# EAGLE board switch panel (EAGLE 7.2.0)
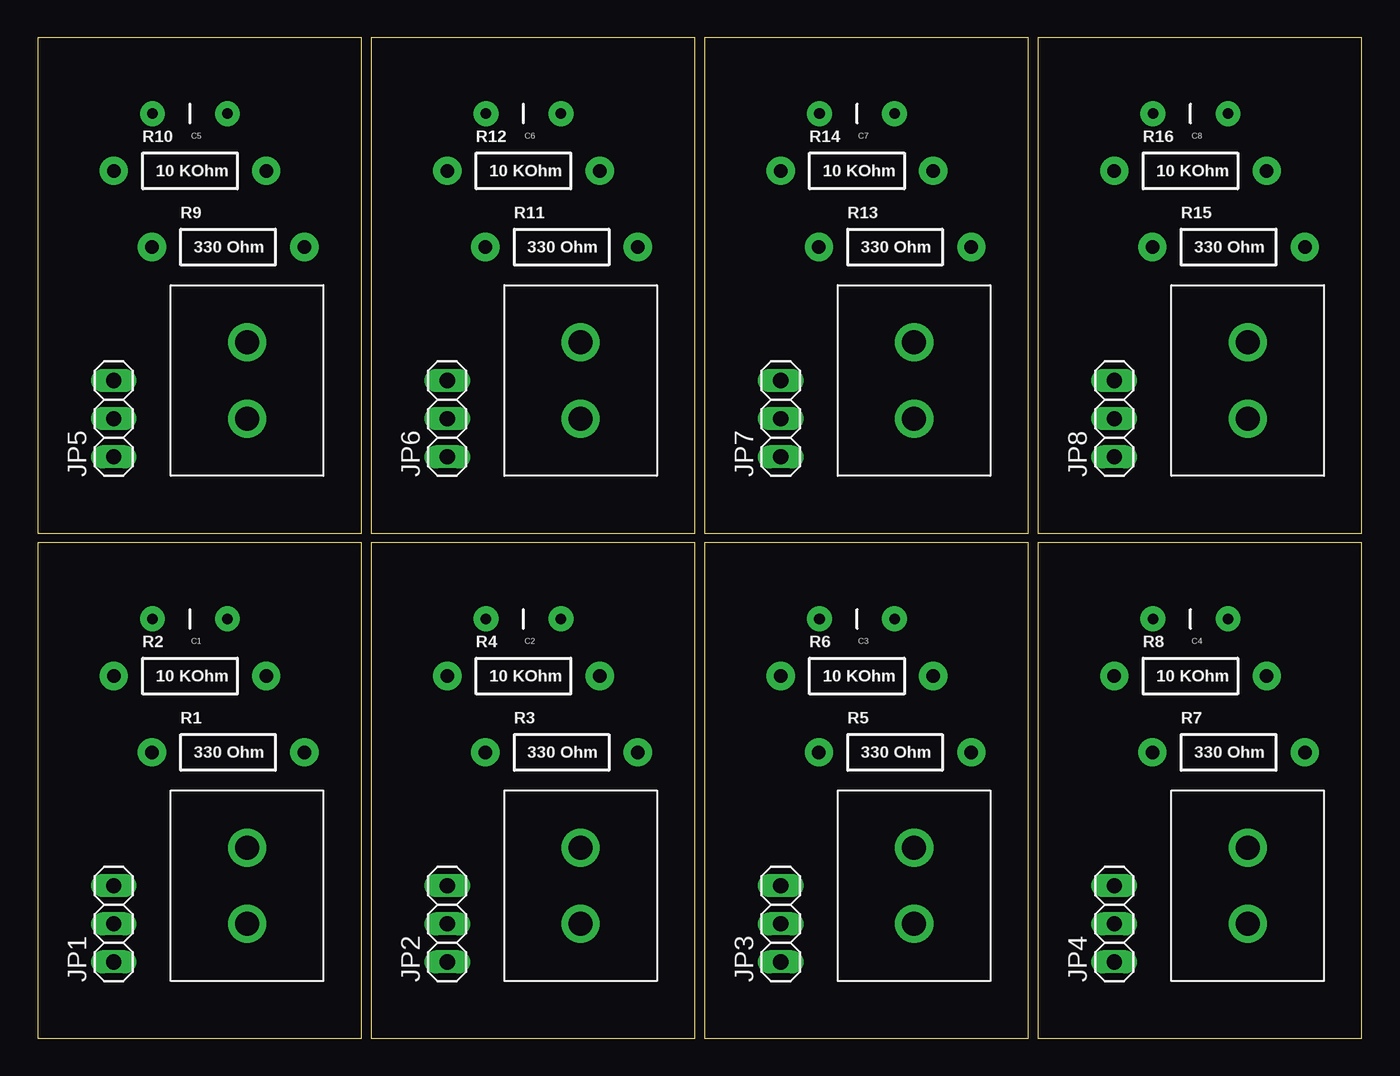
[diagram p0: board, top side]
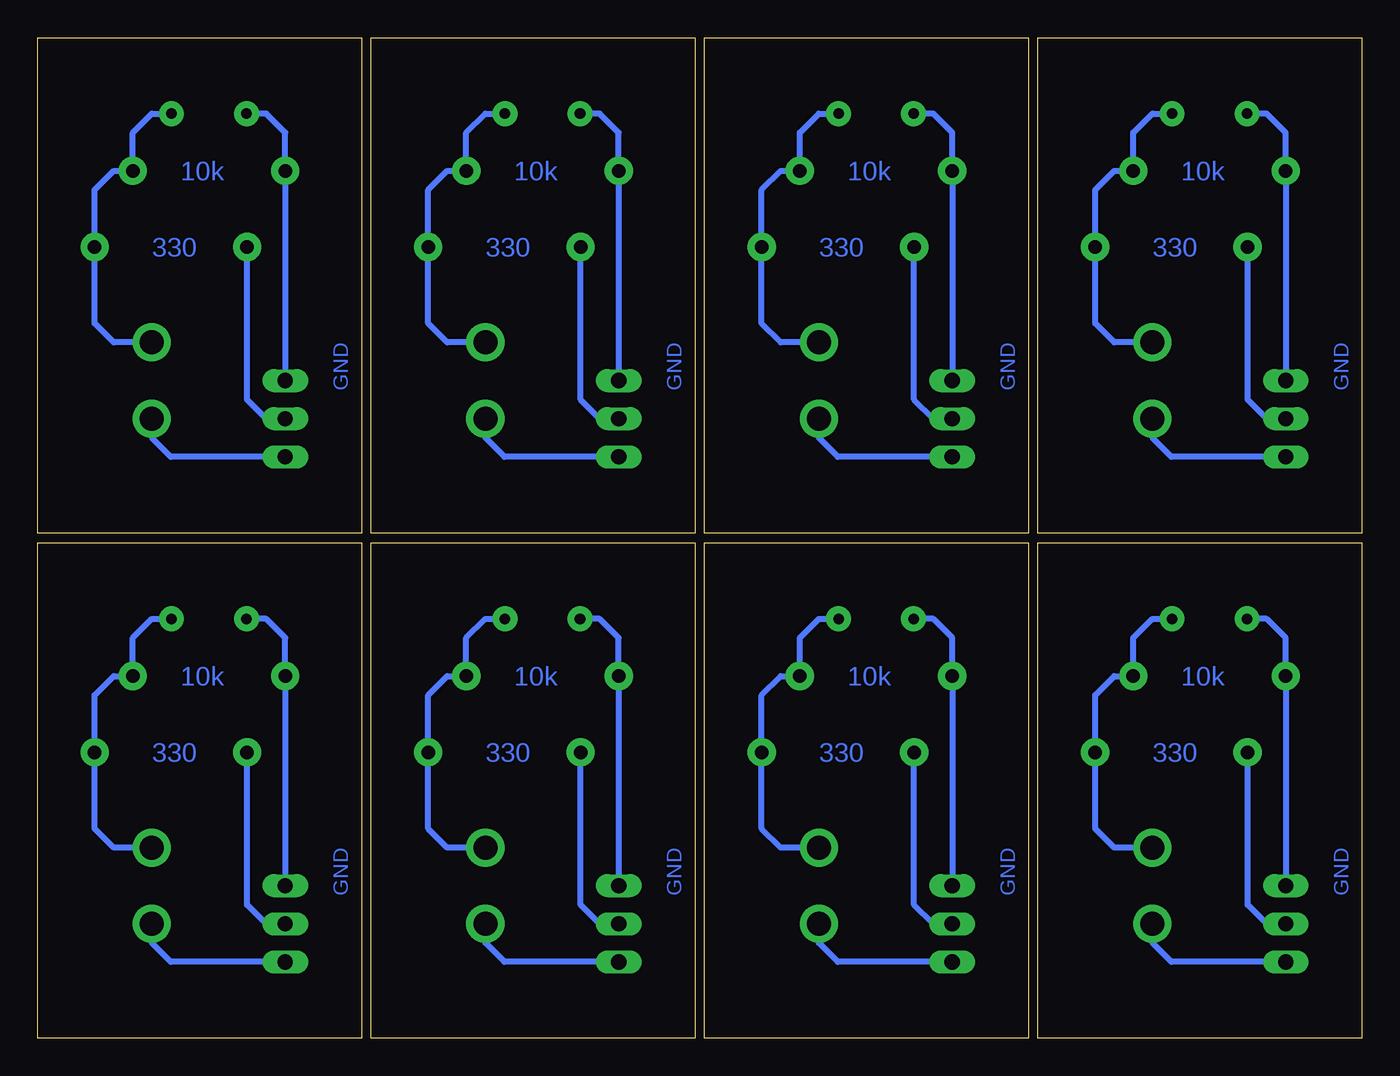
[diagram p1: board, bottom side, seen from below]

Size 88.27 x 66.67 mm. Coordinates in mm from the lower left corner, seen from the top.
Outline: 0,0 21.59,0 21.59,33.01 0,33.01 0,0
Outline: 22.23,0 43.81,0 43.81,33.01 22.23,33.01 22.23,0
Outline: 44.45,0 66.04,0 66.04,33.01 44.45,33.01 44.45,0
Outline: 66.67,0 88.27,0 88.27,33.01 66.67,33.01 66.67,0
Outline: 0,33.66 21.59,33.66 21.59,66.67 0,66.67 0,33.66
Outline: 22.23,33.66 43.81,33.66 43.81,66.67 22.23,66.67 22.23,33.66
Outline: 44.45,33.66 66.04,33.66 66.04,66.67 44.45,66.67 44.45,33.66
Outline: 66.67,33.66 88.27,33.66 88.27,66.67 66.67,66.67 66.67,33.66
Copper layers (1*16): Top 0.035mm / dielectric 1.5mm / Bottom 0.035mm
Design rules "default": minimum track width 10mil, minimum drill 24mil, track to track 8mil, track to pad 8mil, pad to pad 8mil, via to via 8mil, smd to smd 8mil, copper to edge 40mil, drill to drill 8mil, minimum pad ring 10mil, minimum via ring 8mil, stop-mask expansion 4mil, vias tented up to drill 0mil, thermal gap 10mil

## Footprints (pad centres in the part's own frame; a part is rotated, then mirrored left to right if it is on the bottom)
CAP-PTH-5MM = drill 0.7 pad 1.651: 1 -2.5,0; 2 2.5,0
1X03 = drill 1.016 long: 1 -2.54,0; 2 0,0; 3 2.54,0
AXIAL-0.4 = drill 0.9 pad 1.88: P$1 -5.08,0; P$2 5.08,0
CSAIL_PUSHBUTTON = drill 1.6 pad 2.54: P$1 0,2.54; P$2 0,-2.54

## Placement (x,y rotation side)
C1  1uF  [CAP-PTH-5MM]  10.16,27.94 180 top
C2  1uF  [CAP-PTH-5MM]  32.38,27.94 180 top
C3  1uF  [CAP-PTH-5MM]  54.61,27.94 180 top
C4  1uF  [CAP-PTH-5MM]  76.83,27.94 180 top
C5  1uF  [CAP-PTH-5MM]  10.16,61.59 180 top
C6  1uF  [CAP-PTH-5MM]  32.38,61.59 180 top
C7  1uF  [CAP-PTH-5MM]  54.61,61.59 180 top
C8  1uF  [CAP-PTH-5MM]  76.83,61.59 180 top
JP1  [1X03]  5.08,7.62 90 top
JP2  [1X03]  27.3,7.62 90 top
JP3  [1X03]  49.53,7.62 90 top
JP4  [1X03]  71.75,7.62 90 top
JP5  [1X03]  5.08,41.27 90 top
JP6  [1X03]  27.3,41.27 90 top
JP7  [1X03]  49.53,41.27 90 top
JP8  [1X03]  71.75,41.27 90 top
R1  330 Ohm  [AXIAL-0.4]  12.7,19.05 0 top
R2  10 KOhm  [AXIAL-0.4]  10.16,24.13 0 top
R3  330 Ohm  [AXIAL-0.4]  34.92,19.05 0 top
R4  10 KOhm  [AXIAL-0.4]  32.38,24.13 0 top
R5  330 Ohm  [AXIAL-0.4]  57.15,19.05 0 top
R6  10 KOhm  [AXIAL-0.4]  54.61,24.13 0 top
R7  330 Ohm  [AXIAL-0.4]  79.38,19.05 0 top
R8  10 KOhm  [AXIAL-0.4]  76.83,24.13 0 top
R9  330 Ohm  [AXIAL-0.4]  12.7,52.7 0 top
R10  10 KOhm  [AXIAL-0.4]  10.16,57.78 0 top
R11  330 Ohm  [AXIAL-0.4]  34.92,52.7 0 top
R12  10 KOhm  [AXIAL-0.4]  32.38,57.78 0 top
R13  330 Ohm  [AXIAL-0.4]  57.15,52.7 0 top
R14  10 KOhm  [AXIAL-0.4]  54.61,57.78 0 top
R15  330 Ohm  [AXIAL-0.4]  79.38,52.7 0 top
R16  10 KOhm  [AXIAL-0.4]  76.83,57.78 0 top
U$1  CSAIL_PUSHBUTTON  [CSAIL_PUSHBUTTON]  13.97,10.16 180 top
U$2  CSAIL_PUSHBUTTON  [CSAIL_PUSHBUTTON]  36.2,10.16 180 top
U$3  CSAIL_PUSHBUTTON  [CSAIL_PUSHBUTTON]  58.42,10.16 180 top
U$4  CSAIL_PUSHBUTTON  [CSAIL_PUSHBUTTON]  80.64,10.16 180 top
U$5  CSAIL_PUSHBUTTON  [CSAIL_PUSHBUTTON]  13.97,43.81 180 top
U$6  CSAIL_PUSHBUTTON  [CSAIL_PUSHBUTTON]  36.2,43.81 180 top
U$7  CSAIL_PUSHBUTTON  [CSAIL_PUSHBUTTON]  58.42,43.81 180 top
U$8  CSAIL_PUSHBUTTON  [CSAIL_PUSHBUTTON]  80.64,43.81 180 top

## Library data of the parts
C1-C8 = SparkFun-Capacitors
JP1-JP8 = pinhead
R1-R16 = SparkFun-Passives
U$1-U$8 = csailPushbutton

## Nets
GND: C1.2 JP1.3 R2.P$1
GND1: C2.2 JP2.3 R4.P$1
GND2: C3.2 JP3.3 R6.P$1
GND3: C4.2 JP4.3 R8.P$1
GND4: C5.2 JP5.3 R10.P$1
GND5: C6.2 JP6.3 R12.P$1
GND6: C7.2 JP7.3 R14.P$1
GND7: C8.2 JP8.3 R16.P$1
N$1: JP1.2 R1.P$1
N$2: C1.1 R1.P$2 R2.P$2 U$1.P$2
N$3: JP2.2 R3.P$1
N$4: C2.1 R3.P$2 R4.P$2 U$2.P$2
N$5: JP3.2 R5.P$1
N$6: C3.1 R5.P$2 R6.P$2 U$3.P$2
N$7: JP4.2 R7.P$1
N$8: C4.1 R7.P$2 R8.P$2 U$4.P$2
N$9: JP5.2 R9.P$1
N$10: C5.1 R9.P$2 R10.P$2 U$5.P$2
N$11: JP6.2 R11.P$1
N$12: C6.1 R11.P$2 R12.P$2 U$6.P$2
N$13: JP7.2 R13.P$1
N$14: C7.1 R13.P$2 R14.P$2 U$7.P$2
N$15: JP8.2 R15.P$1
N$16: C8.1 R15.P$2 R16.P$2 U$8.P$2
VCC: JP1.1 U$1.P$1
VCC1: JP2.1 U$2.P$1
VCC2: JP3.1 U$3.P$1
VCC3: JP4.1 U$4.P$1
VCC4: JP5.1 U$5.P$1
VCC5: JP6.1 U$6.P$1
VCC6: JP7.1 U$7.P$1
VCC7: JP8.1 U$8.P$1

## Tracks (layer width: path | path; a pad name or v marks a point on that pad's centre or on a via)
GND
  Bottom 0.406: JP1.3 R2.P$1 5.08,26.67 6.35,27.94 C1.2
GND1
  Bottom 0.406: JP2.3 R4.P$1 27.3,26.67 28.57,27.94 C2.2
GND2
  Bottom 0.406: JP3.3 R6.P$1 49.53,26.67 50.8,27.94 C3.2
GND3
  Bottom 0.406: JP4.3 R8.P$1 71.75,26.67 73.03,27.94 C4.2
GND4
  Bottom 0.406: JP5.3 R10.P$1 5.08,60.33 6.35,61.59 C5.2
GND5
  Bottom 0.406: JP6.3 R12.P$1 27.3,60.33 28.57,61.59 C6.2
GND6
  Bottom 0.406: JP7.3 R14.P$1 49.53,60.33 50.8,61.59 C7.2
GND7
  Bottom 0.406: JP8.3 R16.P$1 71.75,60.33 73.03,61.59 C8.2
N$1
  Bottom 0.406: JP1.2 6.35,7.62 7.62,8.89 R1.P$1
N$2
  Bottom 0.406: U$1.P$2 16.51,12.7 17.78,13.97 R1.P$2 17.78,22.86 16.51,24.13 R2.P$2 15.24,26.67 13.97,27.94 C1.1
N$3
  Bottom 0.406: JP2.2 28.57,7.62 29.84,8.89 R3.P$1
N$4
  Bottom 0.406: U$2.P$2 38.73,12.7 40.01,13.97 R3.P$2 40.01,22.86 38.73,24.13 R4.P$2 37.47,26.67 36.2,27.94 C2.1
N$5
  Bottom 0.406: JP3.2 50.8,7.62 52.07,8.89 R5.P$1
N$6
  Bottom 0.406: U$3.P$2 60.96,12.7 62.23,13.97 R5.P$2 62.23,22.86 60.96,24.13 R6.P$2 59.69,26.67 58.42,27.94 C3.1
N$7
  Bottom 0.406: JP4.2 73.03,7.62 74.3,8.89 R7.P$1
N$8
  Bottom 0.406: U$4.P$2 83.19,12.7 84.45,13.97 R7.P$2 84.45,22.86 83.19,24.13 R8.P$2 81.92,26.67 80.64,27.94 C4.1
N$9
  Bottom 0.406: JP5.2 6.35,41.27 7.62,42.55 R9.P$1
N$10
  Bottom 0.406: U$5.P$2 16.51,46.35 17.78,47.62 R9.P$2 17.78,56.52 16.51,57.78 R10.P$2 15.24,60.33 13.97,61.59 C5.1
N$11
  Bottom 0.406: JP6.2 28.57,41.27 29.84,42.55 R11.P$1
N$12
  Bottom 0.406: U$6.P$2 38.73,46.35 40.01,47.62 R11.P$2 40.01,56.52 38.73,57.78 R12.P$2 37.47,60.33 36.2,61.59 C6.1
N$13
  Bottom 0.406: JP7.2 50.8,41.27 52.07,42.55 R13.P$1
N$14
  Bottom 0.406: U$7.P$2 60.96,46.35 62.23,47.62 R13.P$2 62.23,56.52 60.96,57.78 R14.P$2 59.69,60.33 58.42,61.59 C7.1
N$15
  Bottom 0.406: JP8.2 73.03,41.27 74.3,42.55 R15.P$1
N$16
  Bottom 0.406: U$8.P$2 83.19,46.35 84.45,47.62 R15.P$2 84.45,56.52 83.19,57.78 R16.P$2 81.92,60.33 80.64,61.59 C8.1
VCC
  Bottom 0.406: JP1.1 12.7,5.08 13.97,6.35 U$1.P$1
VCC1
  Bottom 0.406: JP2.1 34.92,5.08 36.2,6.35 U$2.P$1
VCC2
  Bottom 0.406: JP3.1 57.15,5.08 58.42,6.35 U$3.P$1
VCC3
  Bottom 0.406: JP4.1 79.38,5.08 80.64,6.35 U$4.P$1
VCC4
  Bottom 0.406: JP5.1 12.7,38.73 13.97,40.01 U$5.P$1
VCC5
  Bottom 0.406: JP6.1 34.92,38.73 36.2,40.01 U$6.P$1
VCC6
  Bottom 0.406: JP7.1 57.15,38.73 58.42,40.01 U$7.P$1
VCC7
  Bottom 0.406: JP8.1 79.38,38.73 80.64,40.01 U$8.P$1

## Text on the board
Bottom: 10k | 10k | 10k | 10k | 330 | 330 | 330 | 330 | GND | GND | GND | GND | 10k | 10k | 10k | 10k | 330 | 330 | 330 | 330 | GND | GND | GND | GND
_tNames: R2 | C1 | R2 | C1 | R2 | C1 | R2 | C1 | R1 | R1 | R1 | R1 | JP1 | JP1 | JP1 | JP1 | C1 | C1 | C1 | C1 | R2 | R2 | R2 | R2 | R1 | R1 | R1 | R1 | JP1 | JP1 | JP1 | JP1